# Altium PCB PCB_BQ25504.PcbDoc
Units mm, origin at the board's own origin, x right, y up, seen from the top; angles counter-clockwise.
Board outline 35 x 38 mm, 2 copper layers (SIGNAL, GND); 22 components, 15 nets, 65 pads, 7 vias.
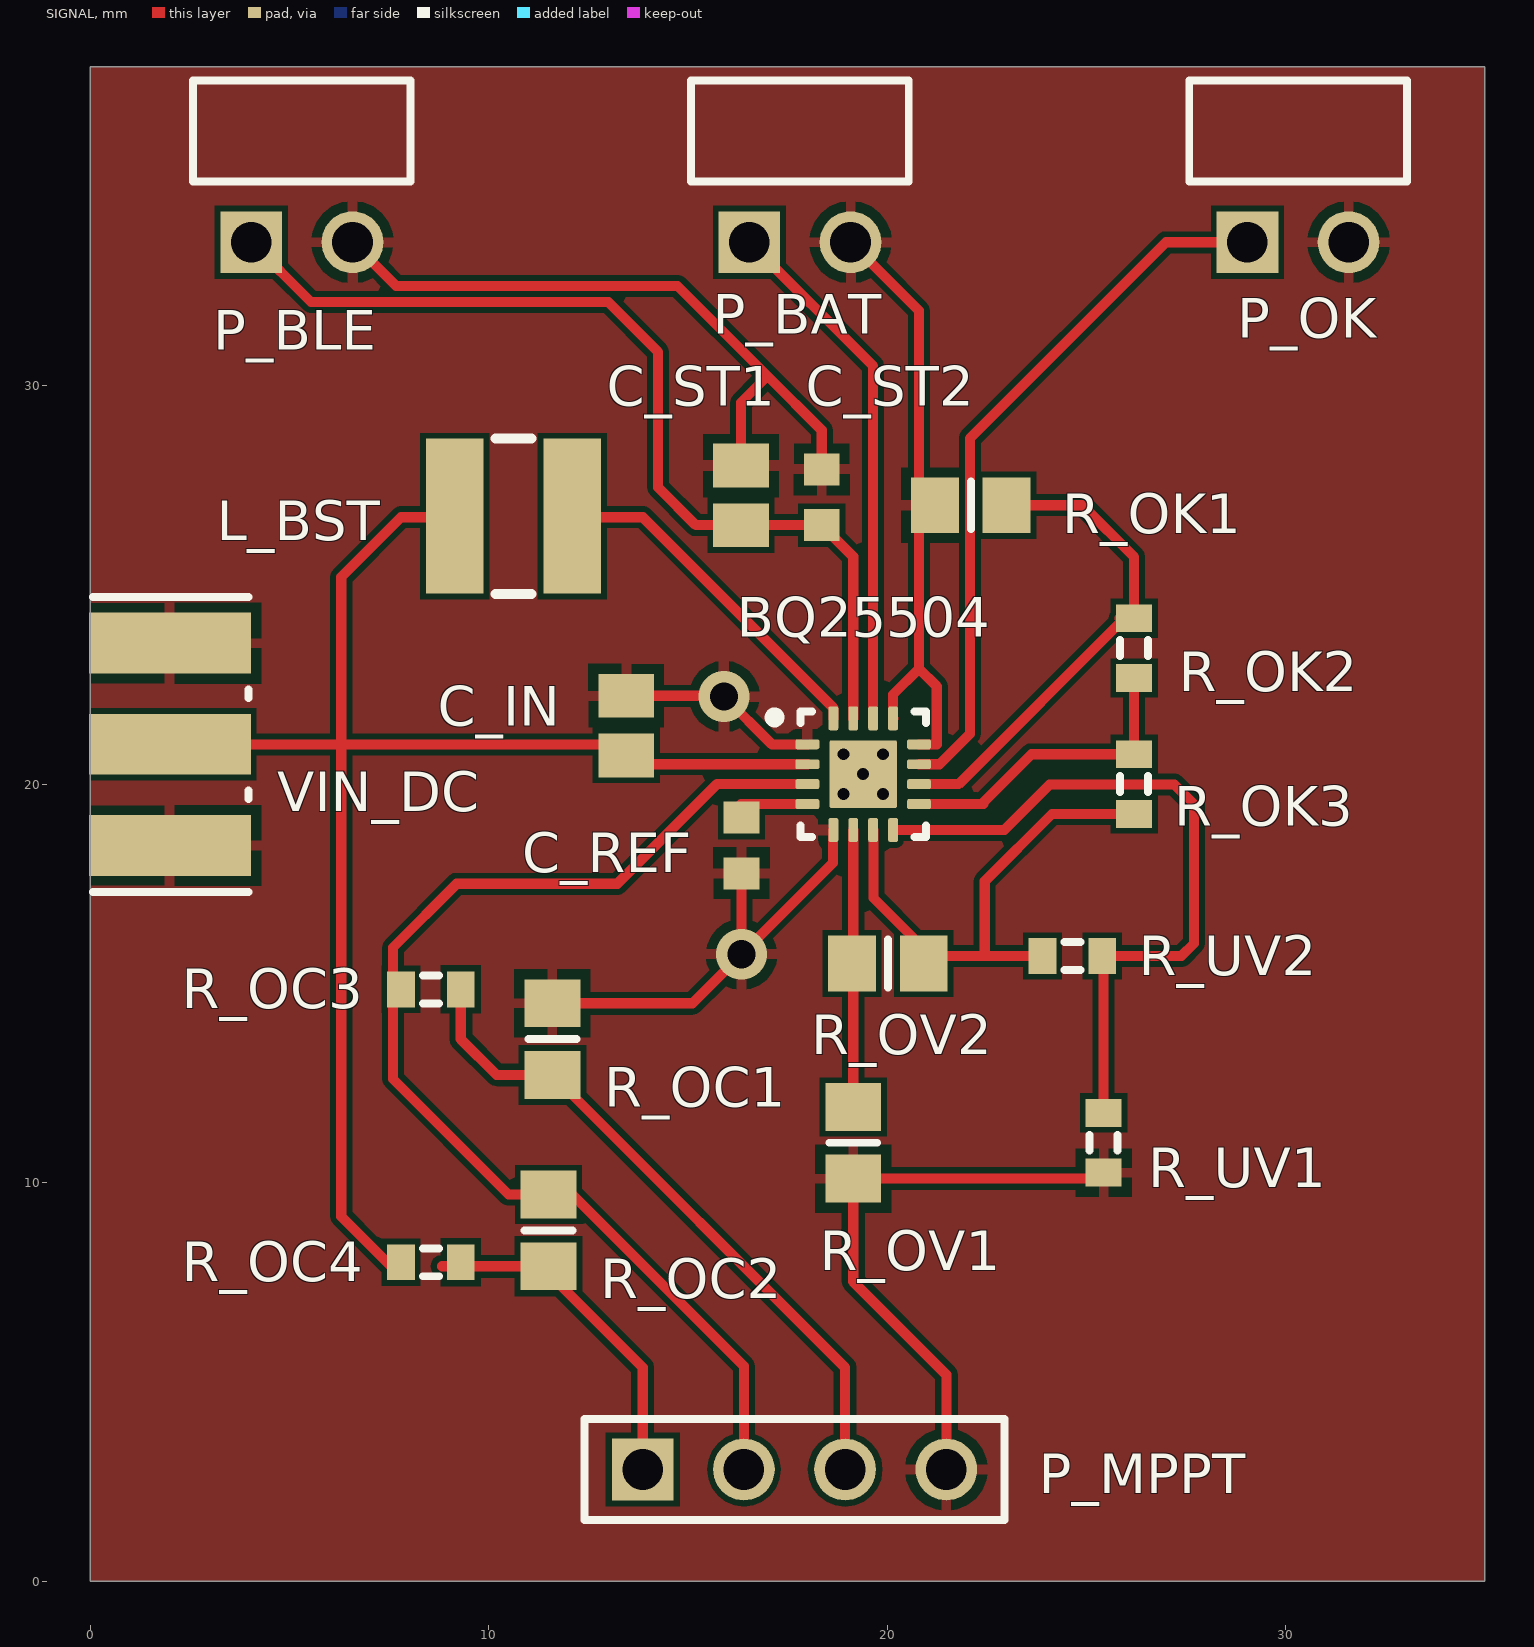
[diagram p0: SIGNAL view]
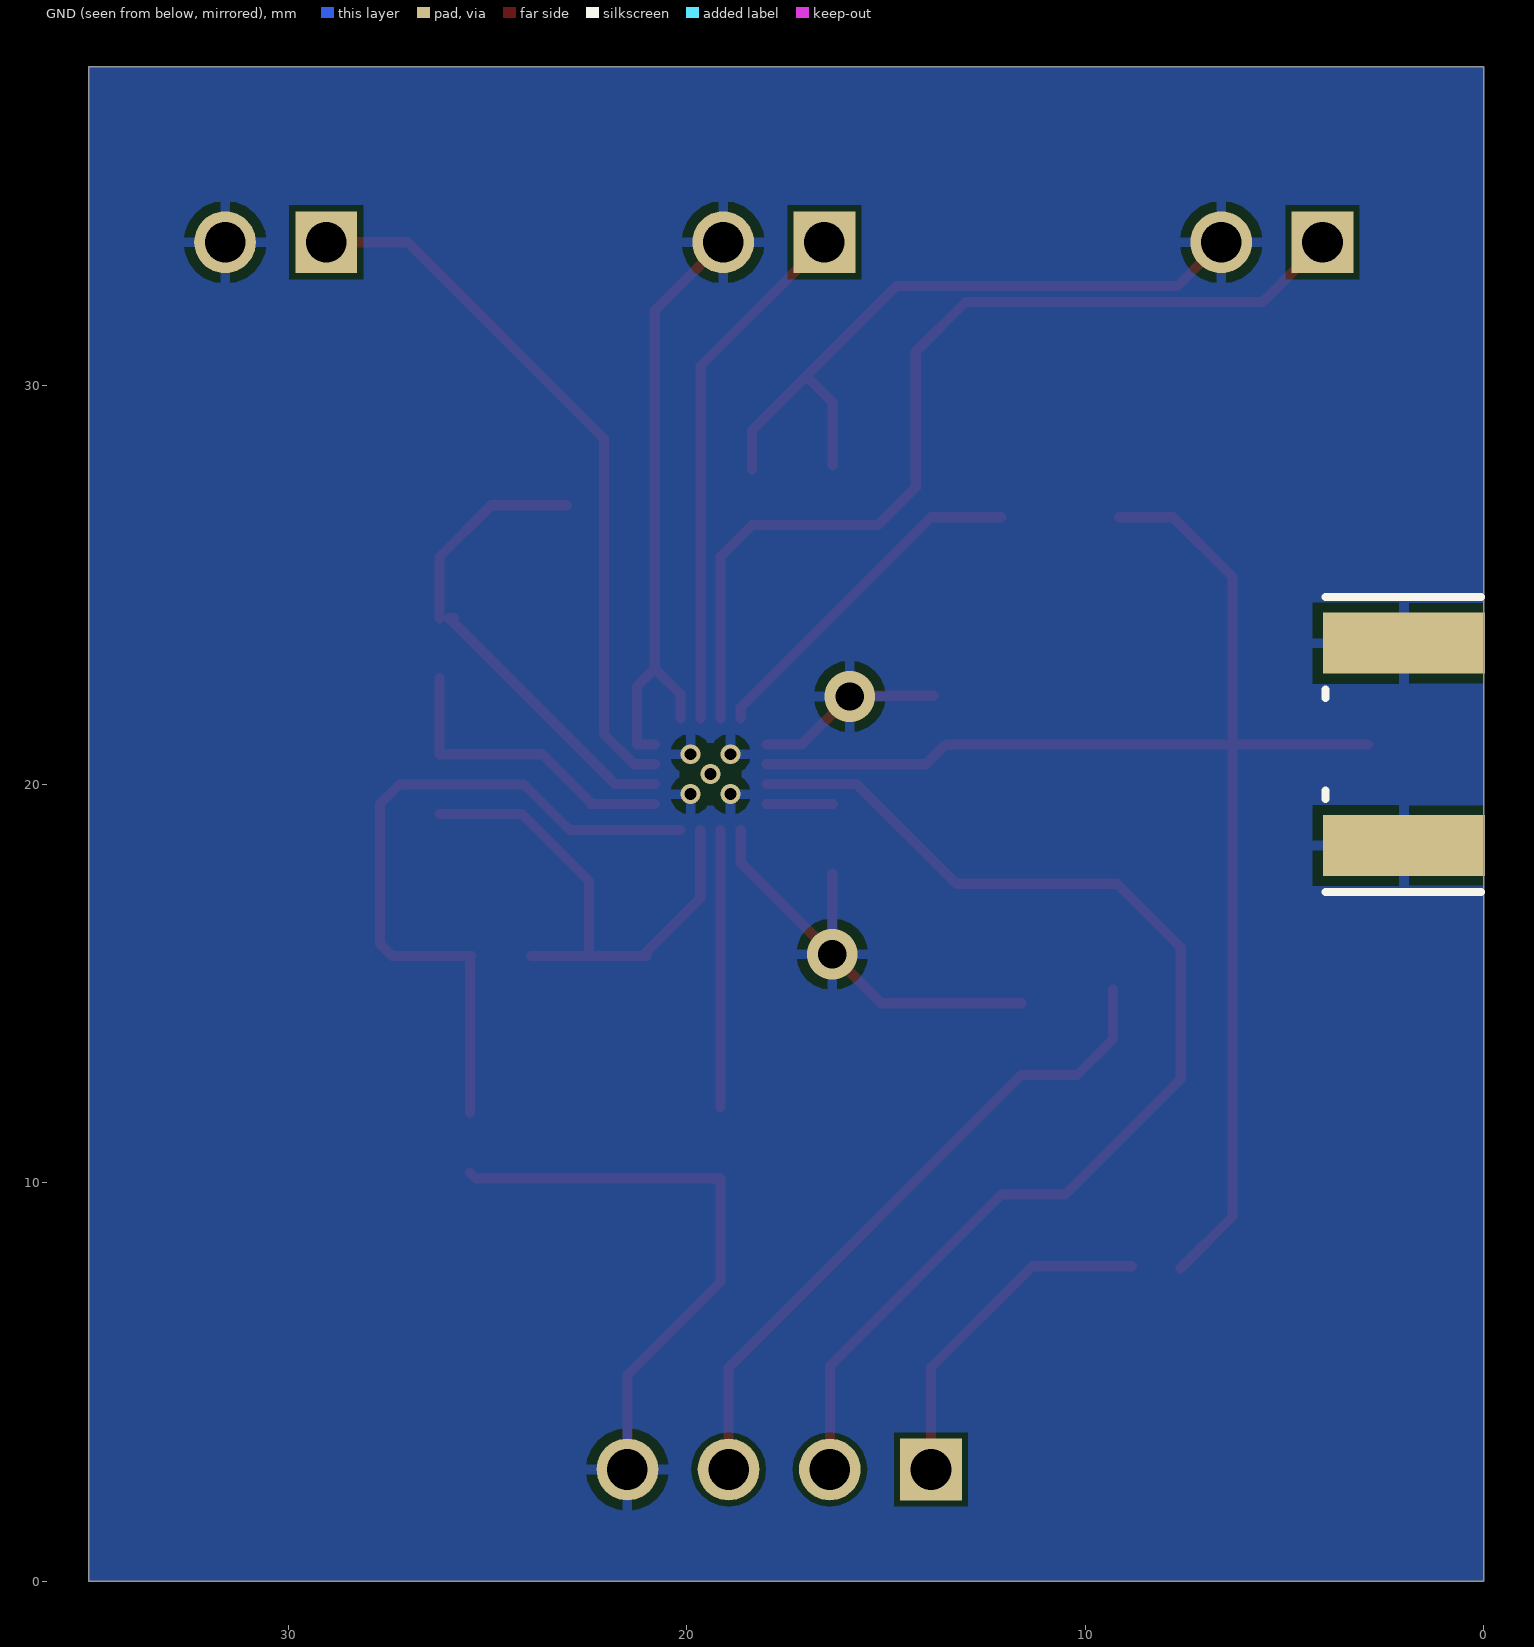
[diagram p1: GND view, seen from below]

## Layer stack, top to bottom
Top Solder: solder mask 0.0102, Solder Resist, Dk 3.5
SIGNAL: signal copper 0.0356
Dielectric 1: dielectric 0.32, FR-4, Dk 4.8
GND: signal copper 0.0356
Bottom Solder: solder mask 0.0102, Solder Resist, Dk 3.5

## Board outline
0,0 35,0 35,38 0,38

## Design rules (kind name [scope] priority, off if disabled: settings)
Clearance [All] p1: gap=0.15 ignorepadtopadclearanceinfootprint=FALSE except(0: Arc-Hole Track-Hole SMDPad-Hole THPad-Hole Via-Hole Fill-Hole Poly-Hole Region-Hole Text-Hole)
MinimumSolderMaskSliver [All] p1: minsoldermaskwidth=0.15
PolygonConnect [All] p1: connectstyle=Relief reliefconductorwidth=0.254 reliefentries=4 polygonreliefangle="90 Angle" airgapwidth=0.254
RoutingVias [All] p1: holewidth=0.711 width=1.27 viastyle="Through Hole" minholewidth=0.711 minwidth=1.27 maxholewidth=0.711 maxwidth=1.27
SilkToSolderMaskClearance [IsPad] p1: minsilkscreentomaskgap=0.15 clearancetoexposedcopper=TRUE
SolderMaskExpansion [All] p1: expansion=0.102
Width [All] p1: maxlimit=0.254 minlimit=0.254 preferedwidth=0.254
28 further rules are at their usual default settings.

## Components (designator, comment, footprint, x,y, rotation, side; value= is the part's Value field where it differs from the comment)
BQ25504 "BQ25504RGTT" RGT0016C_V 19.4,20.25 r0 top
C_IN "Cap Semi" C0805 13.451,21.468 r270 top value=4.7uF
C_REF "Cap Semi" 1608[0603] 16.345,18.46 r90 top value=0.01uF
C_ST1 "Cap Semi" C0805 16.333,27.246 r270 top value=4.7uF
C_ST2 "Cap Semi" 1608[0603] 18.36,27.2 r270 top value=0.1uF
L_BST "Inductor" LPS4018 10.625,26.725 r0 top value=22uH
P_BAT "TSW-102-22-L-S-RA" SMTC-TSW-102-22-X-S-RA 16.543,33.6 r0 top
P_BLE "TSW-102-22-L-S-RA" SMTC-TSW-102-22-X-S-RA 4.043,33.6 r0 top
P_MPPT "TSW-104-08-L-S" SMTC-TSW-104-08-X-S 13.866,2.8 r0 top
P_OK "TSW-102-22-L-S-RA" SMTC-TSW-102-22-X-S-RA 29.043,33.6 r0 top
R_OC1 "Res3" 6-0805_N 11.6,13.6 r270 top value=10M
R_OC2 "Res3" 6-0805_N 11.5,8.8 r270 top value=10M
R_OC3 "Res3" J1-0603 8.55,14.849 r180 top value=5M
R_OC4 "Res3" J1-0603 8.55,8 r180 top value=5M
R_OK1 "Res3" 6-0805_N 22.1,27 r0 top value=4.03M
R_OK2 "Res3" J1-0603 26.2,23.413 r270 top value=5.32M
R_OK3 "Res3" J1-0603 26.2,20 r270 top value=650k
R_OV1 "Res3" 6-0805_N 19.15,11 r90 top value=6M
R_OV2 "Res3" 6-0805_N 20.021,15.5 r180 top value=4M
R_UV1 "Res3" J1-0603 25.435,11 r90 top value=4.8M
R_UV2 "Res3" J1-0603 24.65,15.685 r0 top value=5.2M
VIN_DC "CONSMA003.031" CON-SMA-EDGE031 2,21 r180 top

## Footprints (in the part's own frame and the unit in brackets; to place one, negate y for a bottom-side part, rotate by r counter-clockwise, add the part's x,y. Pads: shape width x height; smd on the part's side, far side on the other; paste and mask are expansions set on the pad)
6-0805_N [mm] "Chip Resistor, Body 2.0x1.2mm, IPC Medium Density"
  rect 1.2x1.4 smd: 1(-0.9,0) 2(0.9,0)
  silkscreen extent 0,-0.6 0,0.6, body extent -1.07,-0.7 1.07,0.7, height 0.7
1608[0603] [mm] "Chip Capacitor, Body 1.6x0.8mm, IPC High Density"
  rect 0.8x0.9 smd: 1(-0.7,0) 2(0.7,0)
  body extent -0.87,-0.48 0.87,0.48, height 1.3
C0805 [mm] "Chip Capacitor, Body 2.0x1.3mm, IPC High Density"
  rect 1.1x1.4 smd: 1(-0.75,0) 2(0.75,0)
  body extent -1.1,-0.72 1.1,0.72, height 1.4
CON-SMA-EDGE031 [mil] "Connector, SMA Female Edge Mount for 0.031\" Thick Board, 5-Lead, Body Dia. 7.9mm"
  rect 160x60 smd: 1(0,0) 2(0,-100) 5(0,100)
  rect 160x60 smd far side: 3(0,-100) 4(0,100)
  silkscreen extent -77,-146 76,146, body extent -77,-163 387,163, height 187
J1-0603 [mm] "Chip Resistor, Body 1.6x0.8mm, IPC High Density"
  rect 0.7x0.9 smd: 1(-0.75,0) 2(0.75,0)
  silkscreen extent -0.2,-0.35 0.2,0.35, body extent -0.85,-0.48 0.85,0.48, height 0.9
LPS4018 [mm]
  rect 1.45x3.89 smd: 1(-1.475,0) 2(1.475,0)
  silkscreen extent -0.45,-1.95 0.45,1.95
RGT0016C_V [mm] "QFN, 16-Leads, Body 3x3mm, Pitch 0.5mm, Thermal Pad 1.65x1.65mm"
  rrect40% 0.6x0.25 smd: 1(-1.4,0.75) 2(-1.4,0.25) 3(-1.4,-0.25) 4(-1.4,-0.75) 9(1.4,-0.75) 10(1.4,-0.25) 11(1.4,0.25) 12(1.4,0.75)
  rrect40% 0.25x0.6 smd: 5(-0.75,-1.4) 6(-0.25,-1.4) 7(0.25,-1.4) 8(0.75,-1.4) 13(0.75,1.4) 14(0.25,1.4) 15(-0.25,1.4) 16(-0.75,1.4)
  rrect6% 1.55x1.55 on Top Paste: 17(0,0)
  rrect6% 1.7x1.7 smd paste-0.85: 17(0,0)
  silkscreen extent -2.35,-1.57 1.57,1.58, body extent -1.5,-1.5 1.5,1.5, height 1
SMTC-TSW-102-22-X-S-RA [mm] ".025 SQ Post Terminal Strip Assembly, 1x2 Pins, Right Angle, 2.54mm Pitch, Male"
  rect 1.55x1.55 hole 1.02: 1(0,0)
  round 1.55 hole 1.02: 2(2.54,0)
  silkscreen extent -1.46,1.52 4,4.06, body extent -1.27,-0.32 3.81,9.9, height 3.05
SMTC-TSW-104-08-X-S [mm] ".025 SQ Post Terminal Strip Assembly, 1x4 Pins, Vertical, 2.54mm Pitch, Male"
  rect 1.55x1.55 hole 1.02: 1(0,0)
  round 1.55 hole 1.02: 2(2.54,0) 3(5.08,0) 4(7.62,0)
  silkscreen extent -1.46,-1.27 9.08,1.27, body extent -1.27,-1.27 8.89,1.27, height 8.38

## Part data
BQ25504: library part CMP-0321-00258-2, "Ultra Low Power Boost Converter with Battery Management for Energy Harvester App, 0.13 V, -40 to 85 degC, 16-pin QFN (RGT), Green (RoHS & no Sb/Br)", Manufacturer="Texas Instruments", Over Voltage Protection=N, Code_JEDEC=MO-220, ComponentLink1Description=Datasheet, ComponentLink1URL=http://www.ti.com/general/docs/lit/getliterature.tsp?genericPartNumber=BQ25504&fileType=pdf, DatasheetVersion=SLUSAH0, Eco-Plan="Green (RoHS & no Sb/Br)", Lead Acid=N, Li-Ion=N, Li-Polymer=N, Mounting Technology="Surface Mount", NiCd=N, NiMH=N, PackageDescription="16-Pin Plastic Quad Flat No-Lead, 3 x 3 mm Body, 0.5 mm Pitch, 1.7 x 1.7 mm Exposed Pad", PackageReference=RGT0016C, PackageVersion="revH, Oct-2011", PartNumber=BQ25504RGTT, SubFamily="Battery Charge Management", Vin(Min)(V)=0.13
C_IN C_REF C_ST1 C_ST2: "Capacitor (Semiconductor SIM Model)", LatestRevisionDate=29-May-2009, LatestRevisionNote="IPC-7351 Footprint Added.", PackageDescription="Chip Capacitor", PackageReference=C1206, Published=8-Jun-2000, Publisher="Altium Limited"
P_BAT P_BLE P_OK: library part CMP-1024-00326-1, "0.025\" SQ Post Header, Through-hole, Right Angle, -55 to 125 degC, 2.54 mm Pitch, 2-Pin, Male, RoHS", Manufacturer=Samtec, Temperature Range="-55 to 125 degC", ComponentLink1Description="Manufacturer URL", ComponentLink1URL=http://www.samtec.com, ComponentLink2Description=Datasheet, ComponentLink2URL=http://www.samtec.com/documents/webfiles/pdf/TSW_TH.PDF, ComponentLink3Description="Package Specification", ComponentLink3URL=http://www.samtec.com/documents/webfiles/cpdf/TSW-XXX-XX-XXX-X-XX-XXX-MKT.pdf, DatasheetVersion=F-214, Mounting Technology=Through-hole, Orientation="Right Angle", PackageDescription=".025[0.64] SQ. Post Terminal Strip Assembly", PackageReference=TSW-102-22-X-S-RA, PackageVersion="DM, 8/1988", PartNumber=TSW-102-22-L-S-RA, Pitch="2.54 mm", RoHS=True
P_MPPT: library part CMP-1024-00358-1, "0.025\" SQ Post Header, Through-hole, Vertical, -55 to 125 degC, 2.54 mm Pitch, 4-Pin, Male, RoHS", Manufacturer=Samtec, Temperature Range="-55 to 125 degC", ComponentLink1Description="Manufacturer URL", ComponentLink1URL=http://www.samtec.com, ComponentLink2Description=Datasheet, ComponentLink2URL=http://www.samtec.com/documents/webfiles/pdf/TSW_TH.PDF, ComponentLink3Description="Package Specification", ComponentLink3URL=http://www.samtec.com/documents/webfiles/cpdf/TSW-XXX-XX-XXX-X-XX-XXX-MKT.pdf, DatasheetVersion=F-214, Mounting Technology=Through-hole, Orientation=Vertical, PackageDescription=".025[0.64] SQ. Post Terminal Strip Assembly", PackageReference=TSW-104-08-X-S, PackageVersion="DM, 8/1988", PartNumber=TSW-104-08-L-S, Pitch="2.54 mm", RoHS=True
R_OC1 R_OC2 R_OC3 R_OC4 R_OK1 R_OK2 R_OK3 R_OV1 R_OV2 R_UV1 R_UV2: "Resistor", LatestRevisionDate=29-May-2009, LatestRevisionNote="IPC-7351 Footprint Added.", PackageDescription="Chip Resistor", PackageReference=J1-0603, Published=8-Jun-2000, Publisher="Altium Limited"
VIN_DC: library part CMP-0168-00026-1, "SMA Female Edge Mount Connector for 0.031\" Thick Board", DatasheetVersion="rev1.0, Jul-2006", PackageDescription="SMA Female Edge Mount Connector for 0.031\" Thick Board, 7.9 mm Body Dia.", PackageReference=CON-SMA-EDGE031, PackageVersion="rev1.0, Jul-2006", PCB_Layout="Pads complies with manufacturer's recommendation."
L_BST: Code_IEC=1005, Code_JEITA=0402, LatestRevisionDate=29-May-2009, LatestRevisionNote="IPC-7351 Footprint Added.", PackageDescription="Chip Inductor", PackageReference=0402-A, Published=8-Jun-2000, Publisher="Altium Limited"

## Via types
v1: diameter 0.5, hole 0.3, SIGNAL to GND, 5 vias
v2: diameter 1.27, hole 0.711, SIGNAL to GND, 2 vias

## Nets (pads, with @x,y where several pads share a name; then routed paths per layer and width w, separated by ;. In a path a pad name is that pad's centre, name@x,y a point inside that pad or via, vN(x,y) a via of type N, cw(c..) or ccw(c..) an arc to the next point about the centre after c; other vN are vias at no path point)
AVSS: BQ25504.1 BQ25504.5 BQ25504.12 BQ25504.13 BQ25504.17@19.4,20.25 C_IN.1 C_REF.1 C_ST1.1 C_ST2.1 P_BAT.2 P_BLE.2 P_MPPT.4 P_OK.2 R_OC1.1 R_OK1.1 R_OV1.1 R_UV1.1 VIN_DC.2 VIN_DC.3 VIN_DC.4 VIN_DC.5 | length 63.4
  SIGNAL w0.254: P_BLE.2 7.679,32.504 14.74,32.504 17,30.244 ; R_OC1.1 15.116,14.5 v2(16.345,15.729) ; C_IN.1@13.8,22.218 15.89,22.218 v2(15.907,22.2) 17.107,21 BQ25504.1 ; C_ST1.1 16.333,29.577 17,30.244 ; C_REF.1 v2(16.345,15.729) ; C_ST2.1 18.36,28.884 17,30.244 ; BQ25504.5@18.642,18.85 18.642,18.026 v2(16.345,15.729) ; P_BAT.2 20.8,31.883 20.8,22.9 ; BQ25504.13 20.15,22.25 20.8,22.9 ; BQ25504.13@20.158,21.65 BQ25504.13@20.158,21.652 ; BQ25504.12 21.246,21 21.246,22.454 20.8,22.9 ; P_MPPT.4 21.486,5.179 19.15,7.515 R_OV1.1 25.285,10.1 R_UV1.1
  other v1: 18.9,19.75 19.9,19.75 19.4,20.25 18.9,20.75 19.9,20.75
LBST: BQ25504.16 L_BST.2 | length 8.8
  SIGNAL w0.254: L_BST.2@12.1,26.7 13.866,26.7 18.65,21.916 BQ25504.16
MPPT1_75: P_MPPT.3 R_OC1.2 R_OC3.1 | length 16.9
  SIGNAL w0.254: R_OC3.1 9.3,13.6 10.2,12.7 R_OC1.2 18.946,5.354 P_MPPT.3
MPPT2_25: BQ25504.3 P_MPPT.2 R_OC2.1 R_OC3.2 | length 29.8
  SIGNAL w0.254: P_MPPT.2 16.406,5.394 12.1,9.7 R_OC2.1 10.5,9.7 7.6,12.6 7.6,15.9 9.2,17.5 13.227,17.5 15.727,20 BQ25504.3
MPTT1_25: P_MPPT.1 R_OC2.2 R_OC4.1 | length 8.7
  SIGNAL w0.254: 8.827,7.9 11.325,7.9 13.866,5.359 P_MPPT.1
OK_HYST: BQ25504.9 R_OK2.2 R_OK3.1 | length 8.5
  SIGNAL w0.254: 21.423,19.502 20.802,19.502 BQ25504.9 22.417,19.5 22.417,19.545 23.622,20.75 R_OK3.1 R_OK2.2
OK_PROG: BQ25504.10 R_OK1.2 R_OK2.1 | length 12.3
  SIGNAL w0.254: BQ25504.10 21.794,20 25.957,24.163 R_OK2.1@25.837,24.163 ; R_OK1.2 24.9,27 26.2,25.7 R_OK2.1
VBAT: BQ25504.14 P_BAT.1 | length 13.2
  SIGNAL w0.254: P_BAT.1 19.65,30.493 BQ25504.14
VBAT_OK: BQ25504.11 P_OK.1 | length 18
  SIGNAL w0.254: BQ25504.11 21.317,20.5 22.077,21.26 22.077,28.677 27,33.6 P_OK.1
VBAT_OV: BQ25504.6 R_OV1.2 R_OV2.2 | length 6.9
  SIGNAL w0.254: R_OV1.2 BQ25504.6
VBAT_UV: BQ25504.8 R_UV1.2 R_UV2.2 | length 18.1
  SIGNAL w0.254: BQ25504.8 22.941,18.85 24.083,19.992 27.208,19.992 27.7,19.5 27.7,16 27.385,15.685 R_UV2.2 25.435,15.65 R_UV1.2
VIN_DC: BQ25504.2 C_IN.2 L_BST.1 R_OC4.2 VIN_DC.1 | length 36.7
  SIGNAL w0.254: VIN_DC.1@2.9,21 6.3,21 ; R_OC4.2@7.6,7.85 6.3,9.15 6.3,21 ; L_BST.1@9.15,26.7 7.8,26.7 6.3,25.2 6.3,21 ; BQ25504.2 14,20.5 13.997,20.497 13.495,21 6.3,21
VRDIV: BQ25504.7 R_OK3.2 R_OV2.1 R_UV2.1 | length 13
  SIGNAL w0.254: BQ25504.7 19.658,18.842 19.658,17.142 21,15.8 21,15.685 22.45,15.685 ; R_UV2.1 22.45,15.685 ; R_OK3.2 24.138,19.25 22.45,17.562 22.45,15.685
VREF: BQ25504.4 C_REF.2 | length 1.7
  SIGNAL w0.254: C_REF.2@16.333,19.5 BQ25504.4
VSTOR: BQ25504.15 C_ST1.2 C_ST2.2 P_BLE.1 | length 24.4
  SIGNAL w0.254: P_BLE.1 5.543,32.1 13,32.1 14.251,30.849 14.251,27.449 15.2,26.5 C_ST2.2 19.15,25.71 BQ25504.15
pads on no net: BQ25504.17@19.4,20.25

## Polygon pours and split planes (outlines as drawn)
AVSS on GND "GND_PLANE" (solid, pour order 42): 0,38 35,38 35,0 0,0
no net on GND "GND-No Net" (solid, pour order 14): 17,6.5
no net on GND "GND-No Net 1" (solid, pour order 12): 17,6.5
AVSS on GND "Bottom Layer-No Net" (solid, pour order 4): -11.477,35.243
AVSS on SIGNAL "SIGNAL" (solid, pour order 44): 0,38 35,38 35,0 0,0